# EAGLE board STorM32 BGC mpu module v009 pannelized2 (EAGLE 6.5.0)
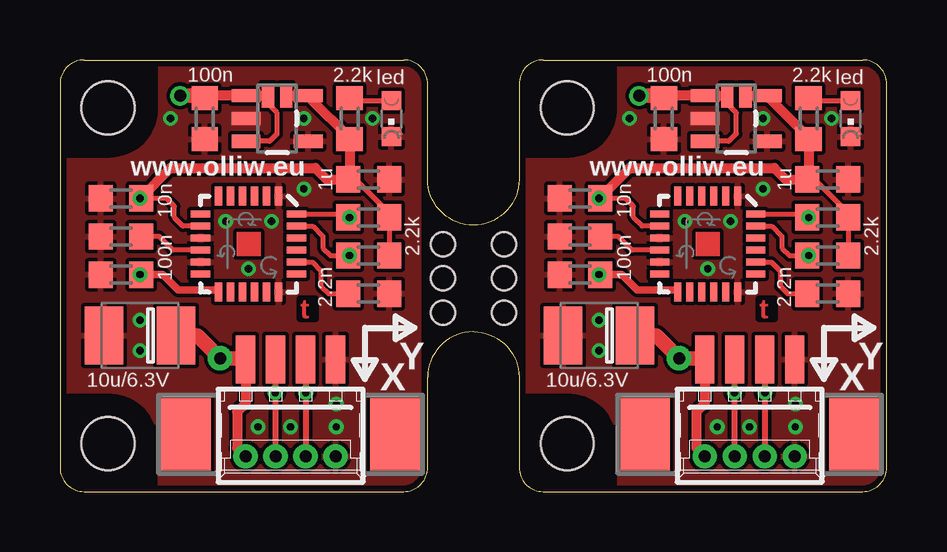
[diagram p0: board, top side]
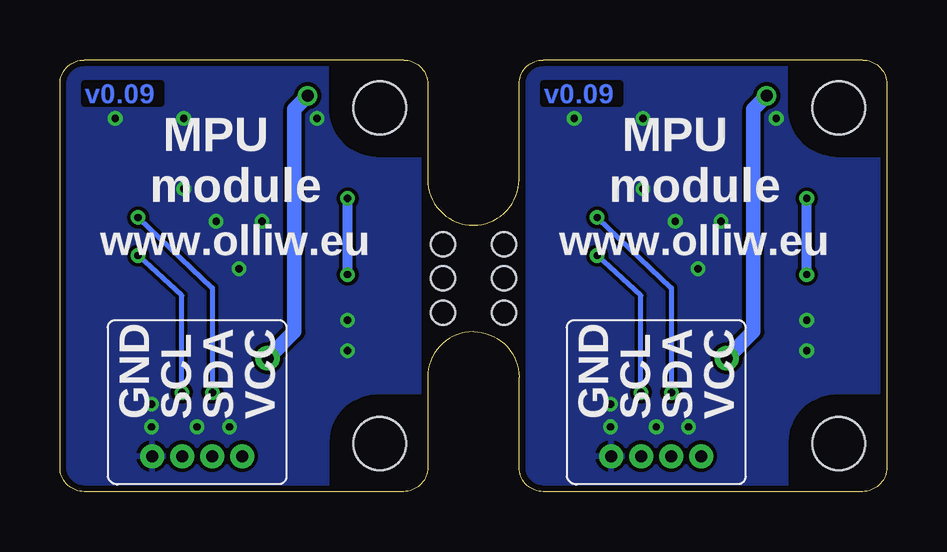
[diagram p1: board, bottom side, seen from below]

Size 34.45 x 18 mm. Coordinates in mm from the lower left corner, seen from the top.
Outline: 15.32,17 arc90 14.32,18 1,18 arc90 0,17 0,1 arc90 1,0 14.32,0 arc90 15.32,1
Outline: 15.32,0.95 15.32,4.76 arc-90 17.22,6.67 arc-90 19.13,4.76 19.13,1 arc90 20.13,0 33.45,0 arc90 34.45,1 34.45,17 arc90 33.45,18 20.13,18 arc90 19.13,17 19.13,13.02 arc-90 17.22,11.11 arc-90 15.32,13.02 15.32,16.99
Copper layers (1*16): Top 0.035mm / dielectric 1.5mm / Bottom 0.035mm
Design rules "Fusion_eagle_rule_v1.1-shapes-supply-changed": minimum track width 6mil, minimum drill 12mil, track to track 6mil, track to pad 6mil, pad to pad 6mil, via to via 6mil, smd to smd 0mil, copper to edge 10mil, drill to drill 10mil, minimum pad ring 10mil, minimum via ring 6mil, stop-mask expansion 2mil, vias tented up to drill 100mil, thermal gap 6mil
Holes 2.2 mm at 2,2 2,16 21.13,2 21.13,16
Holes 1 mm at 15.95,10.32 15.95,8.89 15.95,7.46 18.49,10.32 18.49,8.89 18.49,7.46

## Footprints (pad centres in the part's own frame; a part is rotated, then mirrored left to right if it is on the bottom)
SMC_B = smd 1.6 x 2.4: + -1.5,0; - 1.5,0
C0603 = smd 1 x 1.1: 1 -0.85,0; 2 0.85,0
QFN-24 = smd 0.8 x 0.3: 1 -2,1.25; 2 -2,0.75; 3 -2,0.25; 4 -2,-0.25; 5 -2,-0.75; 6 -2,-1.25; 13 2,-1.25; 14 2,-0.75; 15 2,-0.25; 16 2,0.25; 17 2,0.75; 18 2,1.25 | smd 0.3 x 0.8: 7 -1.25,-2; 8 -0.75,-2; 9 -0.25,-2; 10 0.25,-2; 11 0.75,-2; 12 1.25,-2; 19 1.25,2; 20 0.75,2; 21 0.25,2; 22 -0.25,2; 23 -0.75,2; 24 -1.25,2
SOT23-5 = smd 0.55 x 1.2: 1 -0.95,-1.3; 2 0,-1.3; 3 0.95,-1.3; 4 0.95,1.3; 5 -0.95,1.3
MOLEX-53261-04-SMD-BOTH = smd 0.8 x 2: 1 1.875,-2.5; 2 0.625,-2.5; 3 -0.625,-2.5; 4 -1.875,-2.5 | drill 0.5 pad 0.698: 5 1.875,1.545; 6 0.625,1.545; 7 -0.625,1.545; 8 -1.875,1.545 | smd 2.1 x 3: S1 4.375,0.625; S2 -4.375,0.625
CHIPLED_0603 = smd 0.8 x 0.8: A 0,-0.75; C 0,0.75
R0603 = smd 1 x 1.1: 1 -0.85,0; 2 0.85,0
SJ_2S-NO = smd 0.508 x 1.016: 1 -0.381,0; 2 0.381,0

## Placement (x,y rotation side)
C1  10u/6.3V  [SMC_B]  3.33,6.51 180 top
C2  100n  [C0603]  6.03,15.56 270 top
C3  100n  [C0603]  2.54,9.05 180 top
C4  10n  [C0603]  2.54,12.22 180 top
C5  2.2n  [C0603]  12.86,8.26 0 top
C6  100n  [C0603]  2.54,10.64 180 top
C7  1u  [C0603]  12.86,13.02 0 top
C8  10u/6.3V  [SMC_B]  22.46,6.51 180 top
C9  100n  [C0603]  21.67,10.64 180 top
C10  10n  [C0603]  21.67,12.22 180 top
C11  2.2n  [C0603]  31.99,8.26 0 top
C12  100n  [C0603]  21.67,9.05 180 top
C13  100n  [C0603]  25.16,15.56 270 top
C14  1u  [C0603]  31.99,13.02 0 top
IC1  MPU6050  [QFN-24]  7.86,10.32 270 top
IC2  [SOT23-5]  9.05,15.56 270 top
IC3  MPU6050  [QFN-24]  26.99,10.32 270 top
IC4  [SOT23-5]  28.18,15.56 270 top
JP1  I2C#2  [MOLEX-53261-04-SMD-BOTH]  9.6,3.02 180 top
JP2  I2C#2  [MOLEX-53261-04-SMD-BOTH]  28.73,3.02 180 top
LED1  red  [CHIPLED_0603]  13.81,15.56 180 top
LED2  red  [CHIPLED_0603]  32.94,15.56 180 top
R1  2.2k  [R0603]  12.06,15.56 90 top
R2  2.2k  [R0603]  12.86,9.84 0 top
R3  2.2k  [R0603]  12.86,11.43 0 top
R4  2.2k  [R0603]  31.99,9.84 0 top
R5  2.2k  [R0603]  31.99,11.43 0 top
R6  2.2k  [R0603]  31.19,15.56 90 top
SJ1  SOLDERJUMPERNO  [SJ_2S-NO]  9.05,16.51 0 top
SJ2  SOLDERJUMPERNO  [SJ_2S-NO]  28.18,16.51 0 top

## Library data of the parts
C1-C14 R1-R6 = rcl
IC1-IC4 SJ1 SJ2 = # SparkFun2
JP1 JP2 = # stdlib
LED1 LED2 = led

## Nets
3.3V: C3.1 C4.1 C7.1 IC1.8 IC1.13 IC2.5 R1.1 R2.2 R3.2 SJ1.2
3.3V1: C10.1 C12.1 C14.1 IC3.8 IC3.13 IC4.5 R4.2 R5.2 R6.1 SJ2.2
5V: C1.+ C2.1 IC2.1 IC2.3 JP1.1 JP1.5 SJ1.1
5V1: C8.+ C13.1 IC4.1 IC4.3 JP2.1 JP2.5 SJ2.1
GND: C1.- C2.2 C3.2 C4.2 C5.2 C6.2 C7.2 IC1.1 IC1.9 IC1.11 IC1.18 IC2.2 IC2.4 JP1.4 JP1.8 LED1.C
GND4: C8.- C9.2 C10.2 C11.2 C12.2 C13.2 C14.2 IC3.1 IC3.9 IC3.11 IC3.18 IC4.2 IC4.4 JP2.4 JP2.8 LED2.C
N$1: LED2.A R6.2
N$2: C9.1 IC3.10
N$3: C11.1 IC3.20
N$9: LED1.A R1.2
N$20: C6.1 IC1.10
N$24: C5.1 IC1.20
SCL: IC1.23 JP1.3 JP1.7 R2.1
SCL1: IC3.23 JP2.3 JP2.7 R4.1
SDA: IC1.24 JP1.2 JP1.6 R3.1
SDA1: IC3.24 JP2.2 JP2.6 R5.1

## Tracks (layer width: path | path; a pad name or v marks a point on that pad's centre or on a via)
3.3V  (via drill 0.3 pad 0.61)
  Top 0.152: 13.65,11.67 R3.2 | v3.33,12.22 C4.1
  Top 0.203: R3.2 R2.2 | 13.65,11.67 12.38,12.94 12.09,12.94 C7.1 | IC1.8 5.12,11.07 4.76,11.43 4.76,11.91 4.45,12.22 C4.1 | IC2.5
  Top 0.305: 6.61,8.2 IC1.13 6.51,8.41 4.92,8.41 4.29,9.05 C3.1
  Top 0.406: C3.1 v3.33,9.05 | v3.33,12.22 4.6,13.49 10.64,13.49 11.11,13.02 C7.1 12.07,13.07 R1.1 12.07,14.76 10.48,16.35 IC2.5 | SJ1.2 IC2.5
  Bottom 0.406: v3.33,9.05 v3.33,12.22
3.3V1  (via drill 0.3 pad 0.61)
  Top 0.152: 32.78,11.67 R5.2 | v22.46,12.22 C10.1
  Top 0.203: R5.2 R4.2 | 32.78,11.67 31.51,12.94 31.22,12.94 C14.1 | IC3.8 24.25,11.07 23.89,11.43 23.89,11.91 23.57,12.22 C10.1 | IC4.5
  Top 0.305: 25.74,8.2 IC3.13 25.64,8.41 24.05,8.41 23.42,9.05 C12.1
  Top 0.406: C12.1 v22.46,9.05 | v22.46,12.22 23.73,13.49 29.77,13.49 30.24,13.02 C14.1 31.19,13.07 R6.1 31.19,14.76 29.61,16.35 IC4.5 | SJ2.2 IC4.5
  Bottom 0.406: v22.46,9.05 v22.46,12.22
5V  (via drill 0.5 pad 0.81, 0.5 pad 1.02)
  Top 0.203: IC2.3 8.73,14.6 9.05,14.92 9.05,15.8 8.67,16.18 SJ1.1
  Top 0.406: JP1.1 7.73,3.68 7.38,3.33 7.38,1.82 JP1.5 | C2.1 6.13,16.51 6.19,16.51 IC2.1 SJ1.1
  Top 0.61: 6.19,16.51 v5,16.51 | JP1.1 7.69,5.56 v6.67,5.56 5.72,6.51 C1.+
  Bottom 0.61: v6.67,5.56 5.56,6.67 5.56,15.95 v5,16.51
5V1  (via drill 0.5 pad 0.81, 0.5 pad 1.02)
  Top 0.203: IC4.3 27.86,14.6 28.18,14.92 28.18,15.8 27.8,16.18 SJ2.1
  Top 0.406: JP2.1 26.86,3.68 26.51,3.33 26.51,1.82 JP2.5 | C13.1 25.26,16.51 25.32,16.51 IC4.1 SJ2.1
  Top 0.61: 25.32,16.51 v24.13,16.51 | JP2.1 26.82,5.56 v25.8,5.56 24.84,6.51 C8.+
  Bottom 0.61: v25.8,5.56 24.69,6.67 24.69,15.95 v24.13,16.51
GND  (via drill 0.3 pad 0.61)
  other vias: 8.25,2.7 9.6,2.7 13.02,15.56 3.33,5.87 3.33,7.14 8.81,11.27 6.91,11.27 7.86,9.29 11.51,2.7 11.51,3.65 10.16,12.62 4.6,15.56 10.16,15.56
  pour Bottom (isolate 0.152): 0.33,17 arc-90 1,17.67 14.32,17.67 arc-90 14.99,17 14.99,1 arc-90 14.32,0.33 1,0.33 arc-90 0.33,1
  pour Top (isolate 0.152): 0.33,17 arc-90 1,17.67 14.32,17.67 arc-90 14.99,17 14.99,1 arc-90 14.32,0.33 1,0.33 arc-90 0.33,1
  cutout Bottom: 0.27,13.96 2.12,13.96 arc90 4.08,16.02 4.08,17.77 1.02,17.77 arc90 0.27,17.02
  cutout Top: 0.27,13.96 2.12,13.96 arc90 4.08,16.02 4.08,17.77 1.02,17.77 arc90 0.27,17.02
  cutout Bottom: 4.06,0.25 4.06,2.1 arc90 2,4.06 0.25,4.06 0.25,1 arc90 1,0.25
  cutout Top: 4.06,0.25 4.06,2.1 arc90 2,4.06 0.25,4.06 0.25,1 arc90 1,0.25
  pour Top (no thermals): 6.91,16.03 8.65,16.03 8.65,15.08 6.91,15.08
GND4  (via drill 0.3 pad 0.61)
  other vias: 27.38,2.7 28.73,2.7 32.15,15.56 22.46,5.87 22.46,7.14 27.94,11.27 26.04,11.27 26.99,9.29 30.64,2.7 30.64,3.65 29.29,12.62 23.73,15.56 29.29,15.56
  pour Bottom (isolate 0.152): 19.46,17 arc-90 20.13,17.67 33.45,17.67 arc-90 34.12,17 34.12,1 arc-90 33.45,0.33 20.13,0.33 arc-90 19.46,1
  pour Top (isolate 0.152): 19.46,17 arc-90 20.13,17.67 33.45,17.67 arc-90 34.12,17 34.12,1 arc-90 33.45,0.33 20.13,0.33 arc-90 19.46,1
  cutout Bottom: 19.4,13.96 21.25,13.96 arc90 23.21,16.02 23.21,17.77 20.15,17.77 arc90 19.4,17.02
  cutout Top: 19.4,13.96 21.25,13.96 arc90 23.21,16.02 23.21,17.77 20.15,17.77 arc90 19.4,17.02
  cutout Bottom: 23.19,0.25 23.19,2.1 arc90 21.13,4.06 19.38,4.06 19.38,1 arc90 20.13,0.25
  cutout Top: 23.19,0.25 23.19,2.1 arc90 21.13,4.06 19.38,4.06 19.38,1 arc90 20.13,0.25
  pour Top (no thermals): 26.04,16.03 27.78,16.03 27.78,15.08 26.04,15.08
N$1
  Top 0.152: R6.2 31.45,16.31
  Top 0.203: 31.45,16.31 LED2.A
N$2
  Top 0.203: IC3.10 23.82,10.07 23.26,10.64 C9.1
N$3
  Top 0.203: IC3.20 29.64,9.57 30,9.21 30,8.57 30.32,8.26 C11.1
N$9
  Top 0.152: R1.2 12.32,16.31
  Top 0.203: 12.32,16.31 LED1.A
N$20
  Top 0.203: IC1.10 4.7,10.07 4.13,10.64 C6.1
N$24
  Top 0.203: IC1.20 10.51,9.57 10.87,9.21 10.87,8.57 11.19,8.26 C5.1
SCL  (via drill 0.3 pad 0.61)
  Top 0.152: JP1.3 10.23,5.39 | v12.07,9.84 12.07,9.9 R2.1
  Top 0.203: IC1.23 10.52,11.07 10.95,10.64 10.95,10.16 11.27,9.84 R2.1 | 10.24,1.48 JP1.7
  Top 0.254: 10.23,5.39 v10.24,4.13 10.24,1.48
  Bottom 0.203: v10.24,4.13 10.24,8.18 v12.07,9.84
SCL1  (via drill 0.3 pad 0.61)
  Top 0.152: JP2.3 29.36,5.39 | v31.19,9.84 31.19,9.9 R4.1
  Top 0.203: IC3.23 29.65,11.07 30.08,10.64 30.08,10.16 30.4,9.84 R4.1 | 29.37,1.48 JP2.7
  Top 0.254: 29.36,5.39 v29.37,4.13 29.37,1.48
  Bottom 0.203: v29.37,4.13 29.37,8.18 v31.19,9.84
SDA  (via drill 0.3 pad 0.61)
  Top 0.152: 11.87,11.57 R3.1 12.07,11.49 v12.07,11.43 | JP1.2 8.98,5.55
  Top 0.203: IC1.24 11.87,11.57 | 8.97,1.48 JP1.6
  Top 0.254: 8.98,5.55 v8.97,4.13 8.97,1.48
  Bottom 0.203: v12.07,11.43 8.97,8.49 v8.97,4.13
SDA1  (via drill 0.3 pad 0.61)
  Top 0.152: 31,11.57 R5.1 31.19,11.49 v31.19,11.43 | JP2.2 28.11,5.55
  Top 0.203: IC3.24 31,11.57 | 28.1,1.48 JP2.6
  Top 0.254: 28.11,5.55 v28.1,4.13 28.1,1.48
  Bottom 0.203: v31.19,11.43 28.1,8.49 v28.1,4.13

## Text on the board
Top: t | t
Bottom: v0.09 | v0.09
tNames: led | led | www.olliw.eu | www.olliw.eu | X | Y | X | Y
bNames: MPU / module | MPU / module | www.olliw.eu | www.olliw.eu | VCC | SDA | SCL | GND | VCC | SDA | SCL | GND